# Altium PCB 505153_2_1.PcbDoc
Units mil, origin at the board's own origin, x right, y up, seen from the top; angles counter-clockwise.
Board outline 3550 x 2525 mil, 2 copper layers (Top Layer, Bottom Layer); 24 components, 11 nets, 68 pads, 39 vias.
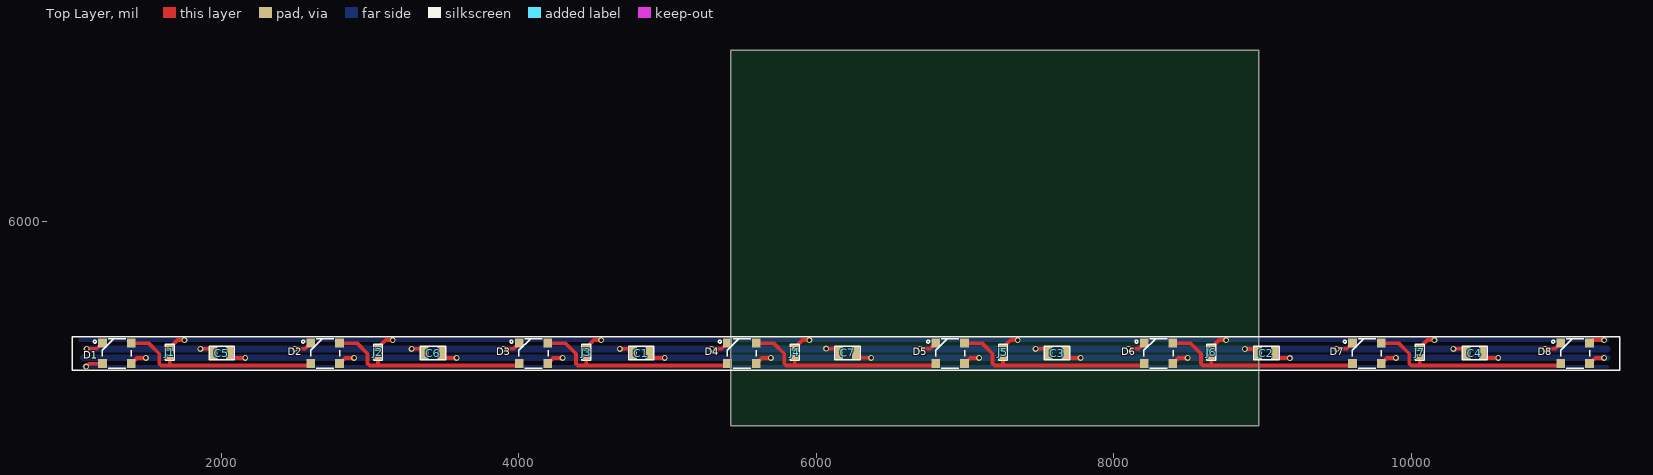
[diagram p0: Top Layer view]
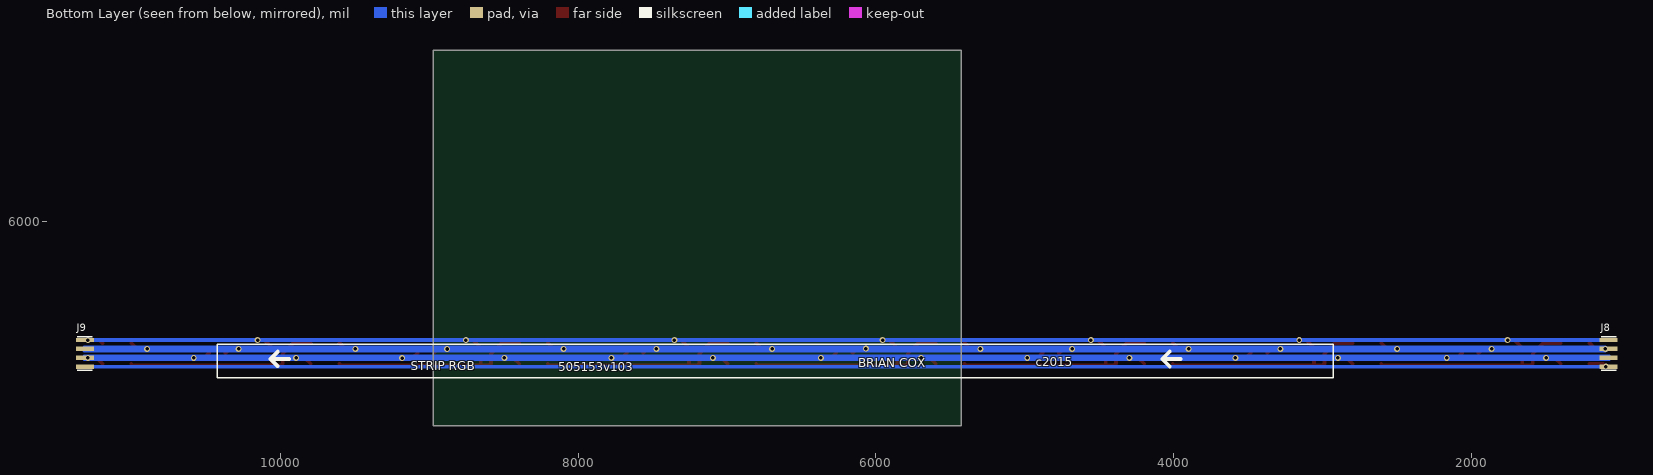
[diagram p1: Bottom Layer view, seen from below]

## Layer stack, top to bottom
Top Layer: signal copper 1.4
Dielectric: core 12.6, FR-4, Dk 4.8
Bottom Layer: signal copper 1.4

## Board outline
5425,4625 8975,4625 8975,7150 5425,7150

## Design rules (kind name [scope] priority, off if disabled: settings)
Clearance LED [(HasFootprint('LED T-1'))] p1: gap=0
Clearance POLYGON [(InPolygon)] p2: gap=35
Clearance JUMPER [(HasFootprint('JUMPER_SMT'))] p3: gap=0
Clearance [All] p4: gap=15
ComponentClearance [All] p1: gap=5 collisioncheckmode=0 verticalgap=10
HoleSize [All] p1: absolutevalues=TRUE maxlimit=126 minlimit=1 maxpercent=80.000 minpercent=20.000
PasteMaskExpansion [All] p1: expansion=-5
PlaneClearance [All] p1: clearance=35
PlaneConnect [All] p1: planeconnectstyle=Relief reliefexpansion=25 reliefentries=4 reliefconductorwidth=25 reliefairgap=25
PolygonConnect [All] p1: connectstyle=Direct reliefconductorwidth=25 reliefentries=4 polygonreliefangle="90 Angle"
RoomDefinition 505153_2_1 [InComponentClass('505153_2_1')] p1: confinementstyle=ConfineIn formatcopy=TRUE lockcomponents=FALSE outline 645,4343 11944,4343 11944,5322 645,5322
RoutingVias [All] p1: holewidth=20 width=41 viastyle="Through Hole" minholewidth=20 minwidth=41 maxholewidth=35 maxwidth=65
SMDNeckDown [All] p1 off: percent=75.000
SolderMaskExpansion [All] p1: expansion=4
TestPointUsage [All] p1: valid=0 allowmultiple=FALSE
Testpoint [All] p1: side=15 testpointundercomponent=TRUE minsize=40 maxsize=100 preferedsize=60 minholesize=0 maxholesize=40 preferedholesize=32 testpointgrid=1 style=1023 order=0-112345678
Width [All] p1: maxlimit=250 minlimit=5 preferedwidth=25 bottomlayer_prefwidth=50 minimp=50.000000 maximp=50.000000 favimp=50.000000
Width DC [(InNet('DC*'))] p2: maxlimit=100 minlimit=15 preferedwidth=50
Width AC [(InNet('AC1') or InNet('AC2'))] p3: maxlimit=100 minlimit=15 preferedwidth=50
14 further rules are at their usual default settings.

## Components (designator, comment, footprint, x,y, rotation, side; value= is the part's Value field where it differs from the comment)
C1 "CAP_1206" SMT_1206_MOD 4824,5115 r90 top
C2 "CAP_1206" SMT_1206_MOD 9025,5114 r90 top
C3 "CAP_1206" SMT_1206_MOD 7618,5115 r90 top
C4 "CAP_1206" SMT_1206_MOD 10425,5115 r90 top
C5 "CAP_1206" SMT_1206_MOD 2005,5115 r90 top
C6 "CAP_1206" SMT_1206_MOD 3425,5115 r90 top
C7 "CAP_1206" SMT_1206_MOD 6211,5116 r90 top
D1 "LED_NEOPIXEL_2" NEOPIXEL_2 1300,5112.5 r180 top
D2 "LED_NEOPIXEL_2" NEOPIXEL_2 2700,5112.5 r180 top
D3 "LED_NEOPIXEL_2" NEOPIXEL_2 4100,5112.5 r180 top
D4 "LED_NEOPIXEL_2" NEOPIXEL_2 5500,5112.5 r180 top
D5 "LED_NEOPIXEL_2" NEOPIXEL_2 6900,5112.5 r180 top
D6 "LED_NEOPIXEL_2" NEOPIXEL_2 8300,5112.5 r180 top
D7 "LED_NEOPIXEL_2" NEOPIXEL_2 9700,5112.5 r180 top
D8 "LED_NEOPIXEL_2" NEOPIXEL_2 11100,5112.5 r180 top
J1 "JUMPER_MOD" JUMPER_SMT 1655,5150 r0 top
J2 "JUMPER_MOD" JUMPER_SMT 3055,5150 r0 top
J3 "JUMPER_MOD" JUMPER_SMT 4455,5150 r0 top
J4 "JUMPER_MOD" JUMPER_SMT 5855,5150 r0 top
J5 "JUMPER_MOD" JUMPER_SMT 7255,5150 r0 top
J6 "JUMPER_MOD" JUMPER_SMT 8655,5150 r0 top
J7 "JUMPER_MOD" JUMPER_SMT 10055,5150 r0 top
J8 "CONN, 4-pin NeoPixel Strip" CONN_NEOPIXEL_1 1075,5112.5 r0 bottom
J9 "CONN, 4-pin NeoPixel Strip" CONN_NEOPIXEL_1 11315,5112.5 r0 bottom

## Footprints (in the part's own frame and the unit in brackets; to place one, negate y for a bottom-side part, rotate by r counter-clockwise, add the part's x,y. Pads: shape width x height; smd on the part's side, far side on the other; paste and mask are expansions set on the pad)
CONN_NEOPIXEL_1 [mil] "Adafruit Neopixel"
  rect 120x30 smd: 1(0,-90) 2(0,-30) 3(0,30) 4(0,90)
  silkscreen extent -50,-112 50,112
JUMPER_SMT [mil]
  rect 50x40 smd: 1(0,0) 2(0,-60)
  silkscreen extent -30,-85 30,25
NEOPIXEL_2 [mm] "Adafruit Neopixel"
  rect 1.5x1.5 smd: 1(2.45,-1.75) 2(2.45,1.75) 3(-2.45,1.75) 4(-2.45,-1.75)
  silkscreen extent -2.5,-2.5 4,2.5
SMT_1206_MOD [mil]
  rect 80x50 smd: 1(0,55) 2(0,-55)
  silkscreen extent -45,-85 45,85

## Part data
C1 C2 C3 C4 C5 C6 C7: "CAP"
D1 D2 D3 D4 D5 D6 D7 D8: "RGB NEOPIXEL"
J8: library part "HEADER, 4-pin", "PROG HEADER"
J9: "Conn Neopixel Strip"

## Via types
v1: diameter 40, hole 23.62, Top Layer to Bottom Layer, 39 vias

## Nets (pads, with @x,y where several pads share a name; then routed paths per layer and width w, separated by ;. In a path a pad name is that pad's centre, name@x,y a point inside that pad or via, vN(x,y) a via of type N, cw(c..) or ccw(c..) an arc to the next point about the centre after c; other vN are vias at no path point)
DI: D1.2 J8.4 J9.4 | length 10359.1
  Top Layer w25: v1(1093,5023) 1113.6,5043.6 D1.2
  Bottom Layer w25: J8.4 J9.4
DO: D8.4 J1.1 J2.1 J3.1 J4.1 J5.1 J6.1 J7.1 J8.1 J9.1 | length 11214.9
  Top Layer w25: J1.1 1707,5202 v1(1754,5202) ; J2.1 3107,5202 v1(3154,5202) ; J3.1 4507,5202 v1(4554,5202) ; J4.1 5907,5202 v1(5954,5202) ; J5.1 7307,5202 v1(7354,5202) ; J6.1 8707,5202 v1(8754,5202) ; J7.1 10107,5202 v1(10154,5202) ; D8.4 11217.06,5202 v1(11294,5202)
  Bottom Layer w25: J8.1@1050,5202.5 J9.1
GND: C1.1 C2.1 C3.1 C4.1 C5.1 C6.1 C7.1 D1.1 D2.1 D3.1 D4.1 D5.1 D6.1 D7.1 D8.1 J8.2 J9.2 | length 11898.8
  Top Layer w25: v1(1097,5143) 1165.15,5143 D1.1 ; v1(1861,5143) 1922,5143 C5.1 ; v1(2497,5143) 2565.15,5143 D2.1 ; v1(3281,5143) 3342,5143 C6.1 ; v1(3897,5143) 3965.15,5143 D3.1 ; v1(4680,5143) 4741,5143 C1.1 ; v1(5297,5143) 5365.15,5143 D4.1 ; v1(6067,5144) 6128,5144 C7.1 ; v1(6697,5143) 6765.15,5143 D5.1 ; v1(7474,5143) 7535,5143 C3.1 ; v1(8097,5143) 8165.15,5143 D6.1 ; v1(8881,5142) 8942,5142 C2.1 ; v1(9497,5143) 9565.15,5143 D7.1 ; v1(10281,5143) 10342,5143 C4.1 ; v1(10897,5143) 10965.15,5143 D8.1
  Bottom Layer w45: J8.2@1100,5142.5 J9.2
NetD1_4: D1.4 D2.2 J1.2 | length 1372.9
  Top Layer w25: D1.4 1513.6,5181.4 1585,5110 1585,5045 1599,5031 2590.94,5031 D2.2 ; J1.2 1655,5034 1658,5031
NetD2_4: D2.4 D3.2 J2.2 | length 1371.7
  Top Layer w25: D2.4 2913.6,5181.4 2985,5110 2985,5045 2999,5031 3990.94,5031 D3.2 ; 3055,5031 J2.2
NetD3_4: D3.4 D4.2 J3.2 | length 1374.2
  Top Layer w25: D3.4 4313.6,5181.4 4385,5110 4385,5045 4399,5031 5390.94,5031 D4.2 ; J3.2 4455,5037 4461,5031
NetD4_4: D4.4 D5.2 J4.2 | length 1372.9
  Top Layer w25: D4.4 5713.6,5181.4 5785,5110 5785,5045 5799,5031 6790.94,5031 D5.2 ; J4.2 5855,5034 5858,5031
NetD5_4: D5.4 D6.2 J5.2 | length 1372.1
  Top Layer w25: D5.4 7113.6,5181.4 7185,5110 7185,5045 7199,5031 8190.94,5031 D6.2 ; 7254,5031 7255,5032 J5.2
NetD6_4: D6.4 D7.2 J6.2 | length 1372.5
  Top Layer w25: D6.4 8513.6,5181.4 8585,5110 8585,5045 8599,5031 9590.94,5031 D7.2 ; J6.2 8655,5033 8657,5031
NetD7_4: D7.4 D8.2 J7.2 | length 1371.7
  Top Layer w25: D7.4 9913.6,5181.4 9985,5110 9985,5045 9999,5031 10990.94,5031 D8.2 ; 10055,5031 J7.2
VDD: C1.2 C2.2 C3.2 C4.2 C5.2 C6.2 C7.2 D1.3 D2.3 D3.3 D4.3 D5.3 D6.3 D7.3 D8.3 J8.3 J9.3 | length 11972.3
  Top Layer w25: D1.3 1434.85,5082 v1(1495,5082) ; C5.2 2093,5082 v1(2163,5082) ; D2.3 2834.85,5082 v1(2895,5082) ; C6.2 3513,5082 v1(3583,5082) ; D3.3 4234.85,5082 v1(4295,5082) ; C1.2 4912,5082 v1(4982,5082) ; D4.3 5634.85,5082 v1(5695,5082) ; C7.2 6299,5083 v1(6369,5083) ; D5.3 7034.85,5082 v1(7095,5082) ; C3.2 7706,5082 v1(7776,5082) ; D6.3 8434.85,5082 v1(8495,5082) ; C2.2 9113,5081 v1(9183,5081) ; D7.3 9834.85,5082 v1(9895,5082) ; C4.2 10513,5082 v1(10583,5082) ; D8.3 11234.85,5082 v1(11295,5082)
  Bottom Layer w45: J8.3 J9.3

## Silkscreen, mask and mechanical layers (free items; w line width, h text height)
Top Overlay:
  lines w10: 1000,5000 1000,5225 11400,5225 11400,5000 1000,5000
Bottom Overlay:
  lines w10: 2925,4950 10425,4950 10425,5175 2925,5175 2925,4950
  lines w25: 3950,5075 4075,5075 ; 4025,5025 4075,5075 ; 4025,5125 4075,5075 ; 9942.77,5075.19 10067.77,5075.19 ; 10017.77,5025.19 10067.77,5075.19 ; 10017.77,5125.19 10067.77,5075.19
  text "c2015" at 4925,5025 h60
  text "BRIAN COX" at 6117.82,5020.47 h60
  text "STRIP RGB" at 9125,5000 h60
  text "505153v103" at 8135,4992.88 h60
Mechanical 3:
  drawing of 367 lines, arcs and shapes, not listed
Mechanical 4:
  text ".Pcb_File_Name" at 1200,3525 h100
  text ".Print_Date" at 1200,3275 h100
Mechanical 5:
  lines w1: 1000,5000 11400,5000 11400,5225 1000,5225 1000,5000
Mechanical 9:
  text "-SB" at 2000,8775 h150
  text "3. All marking on PCB must be white silk screen." at 1200,1775 h100
  text "BOTTOM SILKSCREEN" at 9550,1350 h80
  text "-SB" at 11200,1050 h100
Mechanical 10:
  text "-T" at 2000,8775 h150
  text "3. PCB is double sided." at 1200,1775 h100
  text "4. Holes are plated through." at 1200,1625 h100
  text "5. All bare copper on PCB must be tin plated." at 1210,1475 h100
  text "TOP COPPER" at 9575,1350 h80
  text "-T" at 11200,1050 h100
Mechanical 11:
  text "-B" at 2000,8775 h150
  text "3. PCB is double sided." at 1200,1775 h100
  text "4. Holes are plated through." at 1200,1625 h100
  text "5. All bare copper on PCB must be tin plated." at 1210,1475 h100
  text "BOTTOM COPPER" at 9600,1350 h80
  text "-B" at 11200,1050 h100
Mechanical 12:
  text "-MT" at 2000,8775 h150
  text "3. Top side of PCB must be covered with green solder mask." at 1200,1775 h100
  text "TOP SOLDERMASK" at 9550,1350 h80
  text "-MT" at 11200,1050 h100
Mechanical 13:
  text "-MB" at 2000,8775 h150
  text "3. Bottom side of PCB must be covered with green solder mask." at 1200,1775 h100
  text "BOTTOM SOLDERMASK" at 9550,1350 h80
  text "-MB" at 11200,1050 h100
Mechanical 14:
  text "-ST" at 2000,8775 h150
  text "3. All marking on PCB must be white silk screen." at 1200,1775 h100
  text "TOP SILKSCREEN" at 9550,1350 h80
  text "-ST" at 11200,1050 h100
Mechanical 15:
  text "-D" at 2000,8775 h150
  text "MECHANICAL" at 9550,1350 h80
  text "-D" at 11200,1050 h100
Mechanical 16:
  lines w5: 2500,8700 2500,9000
  lines w10: 7887.71,1275 11500,1275 ; 7887.71,1550 11500,1550 ; 7887.71,1825 11500,1825 ; 7887.71,2100 11487.71,2100 ; 7887.71,8250 11500,8250 ; 7887.71,8400 11500,8400 ; 7887.71,8550 11500,8550 ; 7887.71,8700 11500,8700 ; 7887.71,8850 11500,8850 ; 8137.71,8250 8137.71,9000 ; 8512.71,8250 8512.71,9000 ; 8762.71,8250 8762.71,9000 ; 8787.71,1000 8787.71,1275 ; 8787.71,1550 8787.71,2100 ; 9687.71,1550 9687.71,2100 ; 10587.71,1000 10587.71,1275 ; 10587.71,1825 10587.71,2100 ; 1000,1000 11500,1000 11500,9000 1000,9000 1000,1025 1000,1000
  lines w16: 1000,8700 6292.09,8700 6292.09,9000 ; 2500,8700 2500,9000 ; 7887.71,1000 7887.71,2525 11487.71,2525 ; 7887.71,2100 11500,2100 ; 7887.71,8250 7887.71,9000
  text "REV." at 7925,8900 h50
  text "DATE" at 8233.55,8900 h50
  text "BY" at 8596.05,8900 h50
  text "DESCRIPTION" at 9818.86,8900 h50
  text "PROPRIETARY INFORMATION. DO NOT REPRODUCE, COPY," at 2575,8890 h50
  text "505XXX" at 1125,8775 h150
  text "OR USE WITHOUT EXPRESS WRITTEN PERMISSION." at 2575,8775 h50
  text "PRELIMINARY" at 9750,8750 h60
  text "1" at 7992.71,8745 h60
  text "XXXXXX" at 8155,8745 h60
  text "BC" at 8577.71,8745 h60
  text "-" at 8300,8600 h60
  text "-" at 7992.71,8595 h60
  text "-" at 8617.71,8595 h60
  text "-" at 10111.36,8595 h60
  text "-" at 7992.71,8445 h60
  text "-" at 8300,8445 h60
  text "-" at 8617.71,8445 h60
  text "-" at 10111.36,8445 h60
  text "-" at 7992.71,8295 h60
  text "-" at 8300,8295 h60
  text "-" at 8617.71,8295 h60
  text "-" at 10111.36,8295 h60
  text "space-eight.com" at 8900,2325 h100
  text "REMARKS:" at 1200,2225 h100
  text "343 NW 84TH ST, SEATTLE, WA 98117, PH: 323 791-6991" at 8375,2175 h50
  text "1. Dimensions are in inches." at 1200,2075 h100
  text "DATE:" at 7912.71,2025 h50
  text "DRAWN BY:" at 8812.71,2025 h50
  text "CHECKED BY:" at 9712.71,2025 h50
  text "APPROVED BY:" at 10612.71,2025 h50
  text "2. Board size is X in x X in." at 1200,1925 h100
  text "XXXXXX" at 8100,1885 h80
  text "BC" at 9200,1885 h80
  text "BC" at 10100,1885 h80
  text "LAST REV. DATE:" at 7912.71,1750 h50
  text "REV. LEVEL:" at 8812.71,1750 h50
  text "MATERIAL:" at 9712.71,1750 h50
  text "FR4, NATURAL" at 10200,1725 h50
  text "-" at 8200,1600 h80
  text "1" at 9200,1600 h80
  text "THICKNESS:" at 9712.71,1600 h50
  text ".062in, 1oz. Cu" at 10200,1600 h50
  text "TITLE:" at 7912.71,1475 h50
  text "PCB FOR SP11XXXX" at 8200,1350 h80
  text "SCALE:" at 7912.71,1200 h50
  text "TOL:" at 8812.71,1200 h50
  text ".XX(.X)" at 9200.21,1200 h50
  text ".XXX(.XX)" at 9775.21,1200 h50
  text "ANGLE:" at 10275,1200 h50
  text "DRAWING NUMBER:" at 10625,1200 h50
  text "1:1" at 8311.05,1060 h80
  text ".010(.25)" at 9000,1060 h80
  text ".005(.13)" at 9700,1060 h80
  text "-" at 10423.55,1060 h80
  text "505XXX" at 10625,1050 h100
Drill Drawing:
  text ".Legend" at 1250,2925 h100
  text "Drill Legend" at 1225,2600 h100